# EAGLE board eepromer (EAGLE 6.5.0)
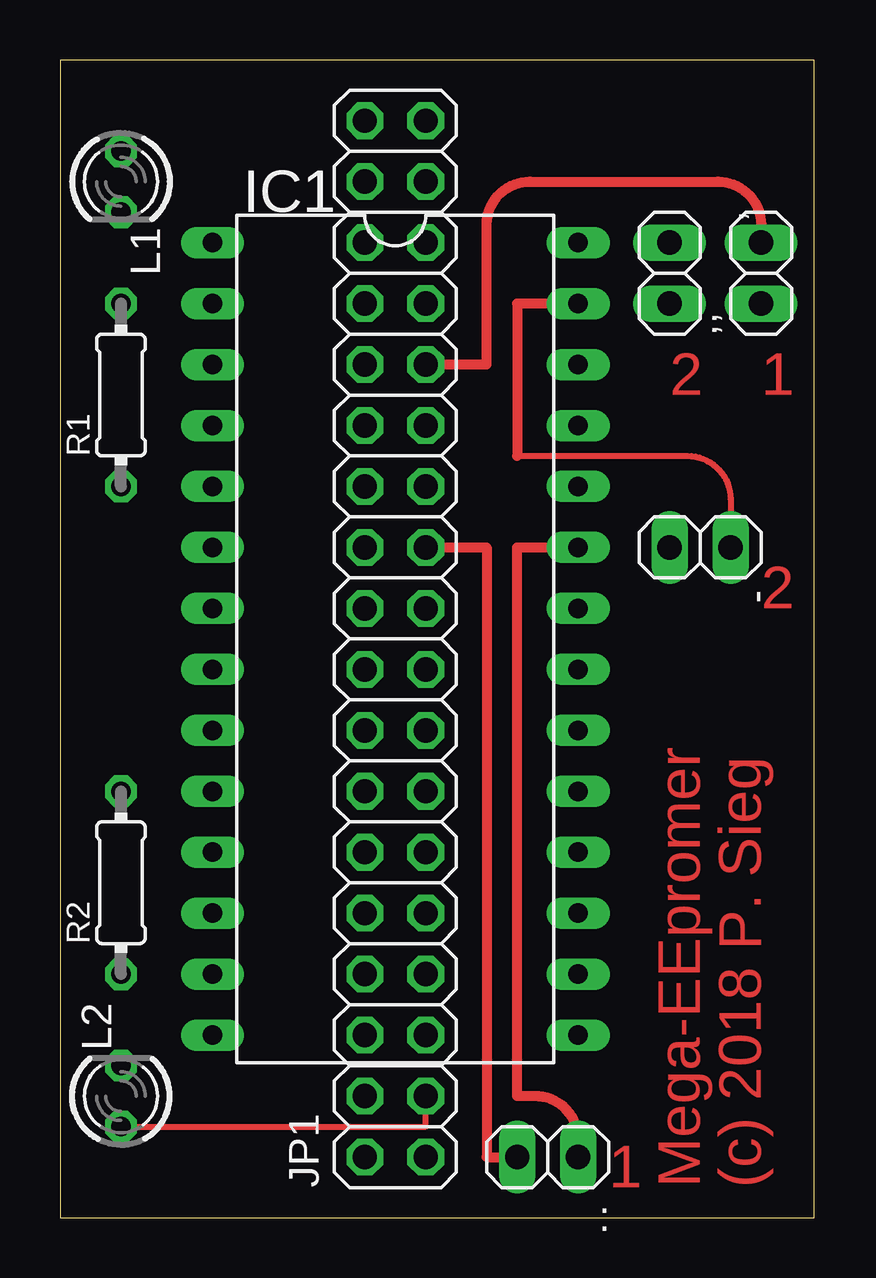
[diagram p0: board, top side]
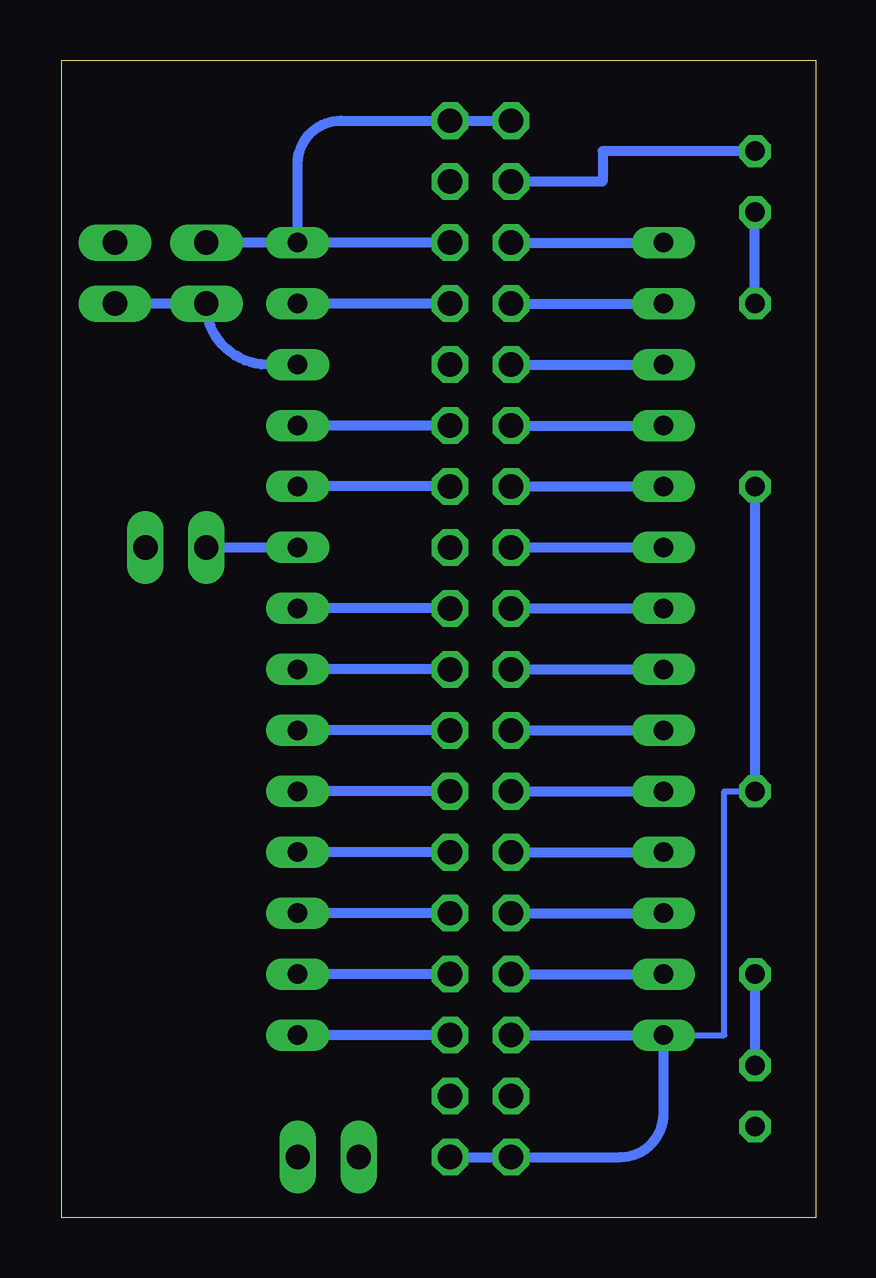
[diagram p1: board, bottom side, seen from below]

Size 31.42 x 48.25 mm. Coordinates in mm from the lower left corner, seen from the top.
Outline: 0,0 31.42,0 31.42,48.25 0,48.25 0,0
Copper layers (1*16): Top 0.035mm / dielectric 1.5mm / Bottom 0.035mm
Design rules "default": minimum track width 10mil, minimum drill 24mil, track to track 8mil, track to pad 8mil, pad to pad 8mil, via to via 8mil, smd to smd 8mil, copper to edge 40mil, drill to drill 8mil, minimum pad ring 10mil, minimum via ring 8mil, stop-mask expansion 4mil, vias tented up to drill 0mil, thermal gap 10mil

## Footprints (pad centres in the part's own frame; a part is rotated, then mirrored left to right if it is on the bottom)
1X02 = drill 1.016 long: 1 -1.27,0; 2 1.27,0
DIL28-6 = drill 0.813 long: 1 -16.51,-7.62; 2 -13.97,-7.62; 3 -11.43,-7.62; 4 -8.89,-7.62; 5 -6.35,-7.62; 6 -3.81,-7.62; 7 -1.27,-7.62; 8 1.27,-7.62; 9 3.81,-7.62; 10 6.35,-7.62; 11 8.89,-7.62; 12 11.43,-7.62; 13 13.97,-7.62; 14 16.51,-7.62; 15 16.51,7.62; 16 13.97,7.62; 17 11.43,7.62; 18 8.89,7.62; 19 6.35,7.62; 20 3.81,7.62; 21 1.27,7.62; 22 -1.27,7.62; 23 -3.81,7.62; 24 -6.35,7.62; 25 -8.89,7.62; 26 -11.43,7.62; 27 -13.97,7.62; 28 -16.51,7.62
2X18 = drill 1.016 octagon: 1 -21.59,-1.27; 2 -21.59,1.27; 3 -19.05,-1.27; 4 -19.05,1.27; 5 -16.51,-1.27; 6 -16.51,1.27; 7 -13.97,-1.27; 8 -13.97,1.27; 9 -11.43,-1.27; 10 -11.43,1.27; 11 -8.89,-1.27; 12 -8.89,1.27; 13 -6.35,-1.27; 14 -6.35,1.27; 15 -3.81,-1.27; 16 -3.81,1.27; 17 -1.27,-1.27; 18 -1.27,1.27; 19 1.27,-1.27; 20 1.27,1.27; 21 3.81,-1.27; 22 3.81,1.27; 23 6.35,-1.27; 24 6.35,1.27; 25 8.89,-1.27; 26 8.89,1.27; 27 11.43,-1.27; 28 11.43,1.27; 29 13.97,-1.27; 30 13.97,1.27; 31 16.51,-1.27; 32 16.51,1.27; 33 19.05,-1.27; 34 19.05,1.27; 35 21.59,-1.27; 36 21.59,1.27
LED3MM = drill 0.813 octagon: A -1.27,0; K 1.27,0
0204/7 = drill 0.813 octagon: 1 -3.81,0; 2 3.81,0

## Placement (x,y rotation side)
'  [1X02]  26.67,27.94 180 top
,  [1X02]  25.4,39.37 270 top
,,  [1X02]  29.21,39.37 90 top
:  [1X02]  20.32,2.54 180 top
IC1  [DIL28-6]  13.97,24.13 270 top
JP1  [2X18]  13.97,24.13 90 top
L1  [LED3MM]  2.54,43.18 270 top
L2  [LED3MM]  2.54,5.08 90 top
R1  560  [0204/7]  2.54,34.29 90 top
R2  560  [0204/7]  2.54,13.97 90 top

## Library data of the parts
' , ,, : JP1 = pinhead
IC1 = ic-package
L1 L2 = led
R1 R2 = rcl

## Nets
S$1: ,.1 IC1.28 JP1.31 JP1.36
S$2: IC1.14 JP1.1 JP1.6 R1.1 R2.2
S$3: JP1.3 L2.A
S$4: ,,.2 JP1.27
S$5: ,,.1 ,.2 IC1.26
S$6: L2.K R2.1
S$7: '.1 IC1.27 JP1.29
S$8: IC1.25 JP1.25
S$9: IC1.24 JP1.23
S$10: IC1.22 JP1.19
S$11: IC1.21 JP1.17
S$12: IC1.20 JP1.15
S$13: IC1.19 JP1.13
S$14: IC1.18 JP1.11
S$15: IC1.17 JP1.9
S$16: IC1.16 JP1.7
S$17: IC1.15 JP1.5
S$18: IC1.13 JP1.8
S$19: IC1.12 JP1.10
S$20: IC1.11 JP1.12
S$21: IC1.10 JP1.14
S$22: IC1.9 JP1.16
S$23: IC1.8 JP1.18
S$24: IC1.7 JP1.20
S$25: IC1.6 JP1.22
S$26: IC1.5 JP1.24
S$27: IC1.4 JP1.26
S$28: IC1.3 JP1.28
S$29: IC1.2 JP1.30
S$30: IC1.1 JP1.32
S$31: :.2 JP1.21
S$32: '.2 :.1 IC1.23
S$33: L1.K R1.2
S$34: JP1.34 L1.A

## Tracks (layer width: path | path; a pad name or v marks a point on that pad's centre or on a via)
S$1
  Bottom 0.406: IC1.28 21.59,43.92 arc90 19.79,45.72 JP1.36 | IC1.28 ,.1 | JP1.31 IC1.28
S$2
  Bottom 0.254: IC1.14 3.81,7.62 3.81,17.78 R2.2
  Bottom 0.406: JP1.1 8.15,2.54 arc-90 6.35,4.34 IC1.14 JP1.6 | R1.1 R2.2
S$3
  Top 0.254: L2.A 15.24,3.81 JP1.3
S$4
  Top 0.406: JP1.27 17.78,35.56 17.78,41.38 arc-90 19.58,43.18 27.41,43.18 arc-90 29.21,41.38 ,,.2
S$5
  Bottom 0.406: IC1.26 22.86,35.56 arc90 ,.2 ,,.1
S$6
  Bottom 0.406: R2.1 L2.K
S$7
  Top 0.254: 19.05,31.75 26.14,31.75 arc-90 27.94,29.95 '.1
  Top 0.406: IC1.27 19.05,38.1 19.05,31.75
  Bottom 0.406: JP1.29 IC1.27
S$8
  Bottom 0.406: JP1.25 IC1.25
S$9
  Bottom 0.406: JP1.23 IC1.24
S$10
  Bottom 0.406: JP1.19 IC1.22
S$11
  Bottom 0.406: JP1.17 IC1.21
S$12
  Bottom 0.406: JP1.15 IC1.20
S$13
  Bottom 0.406: JP1.13 IC1.19
S$14
  Bottom 0.406: JP1.11 IC1.18
S$15
  Bottom 0.406: JP1.9 IC1.17
S$16
  Bottom 0.406: JP1.7 IC1.16
S$17
  Bottom 0.406: JP1.5 IC1.15
S$18
  Bottom 0.406: JP1.8 IC1.13
S$19
  Bottom 0.406: JP1.10 IC1.12
S$20
  Bottom 0.406: JP1.12 IC1.11
S$21
  Bottom 0.406: JP1.14 IC1.10
S$22
  Bottom 0.406: JP1.16 IC1.9
S$23
  Bottom 0.406: JP1.18 IC1.8
S$24
  Bottom 0.406: JP1.20 IC1.7
S$25
  Bottom 0.406: JP1.22 IC1.6
S$26
  Bottom 0.406: JP1.24 IC1.5
S$27
  Bottom 0.406: JP1.26 IC1.4
S$28
  Bottom 0.406: JP1.28 IC1.3
S$29
  Bottom 0.406: JP1.30 IC1.2
S$30
  Bottom 0.406: JP1.32 IC1.1
S$31
  Top 0.406: JP1.21 17.78,27.94 17.78,2.54 :.2
S$32
  Top 0.406: :.1 21.59,3.28 arc90 19.79,5.08 19.05,5.08 19.05,27.94 IC1.23
  Bottom 0.406: '.2 IC1.23
S$33
  Bottom 0.406: R1.2 L1.K
S$34
  Bottom 0.406: L1.A 8.89,44.45 8.89,43.18 JP1.34

## Text on the board
Top: 2 | 1 | 2 | 1 | Mega-EEpromer | (c) 2018 P. Sieg